# Altium PCB IDE_44m_to_40f_left.PcbDoc
Units mm, origin at the board's own origin, x right, y up, seen from the top; angles counter-clockwise.
Board outline 60.07 x 36.32 mm, 2 copper layers (Top Layer, Bottom Layer), stack 1.594 mm thick; 6 components, 35 nets, 96 pads, 2 vias.
Unrouted connection lines stored in the file: 36.
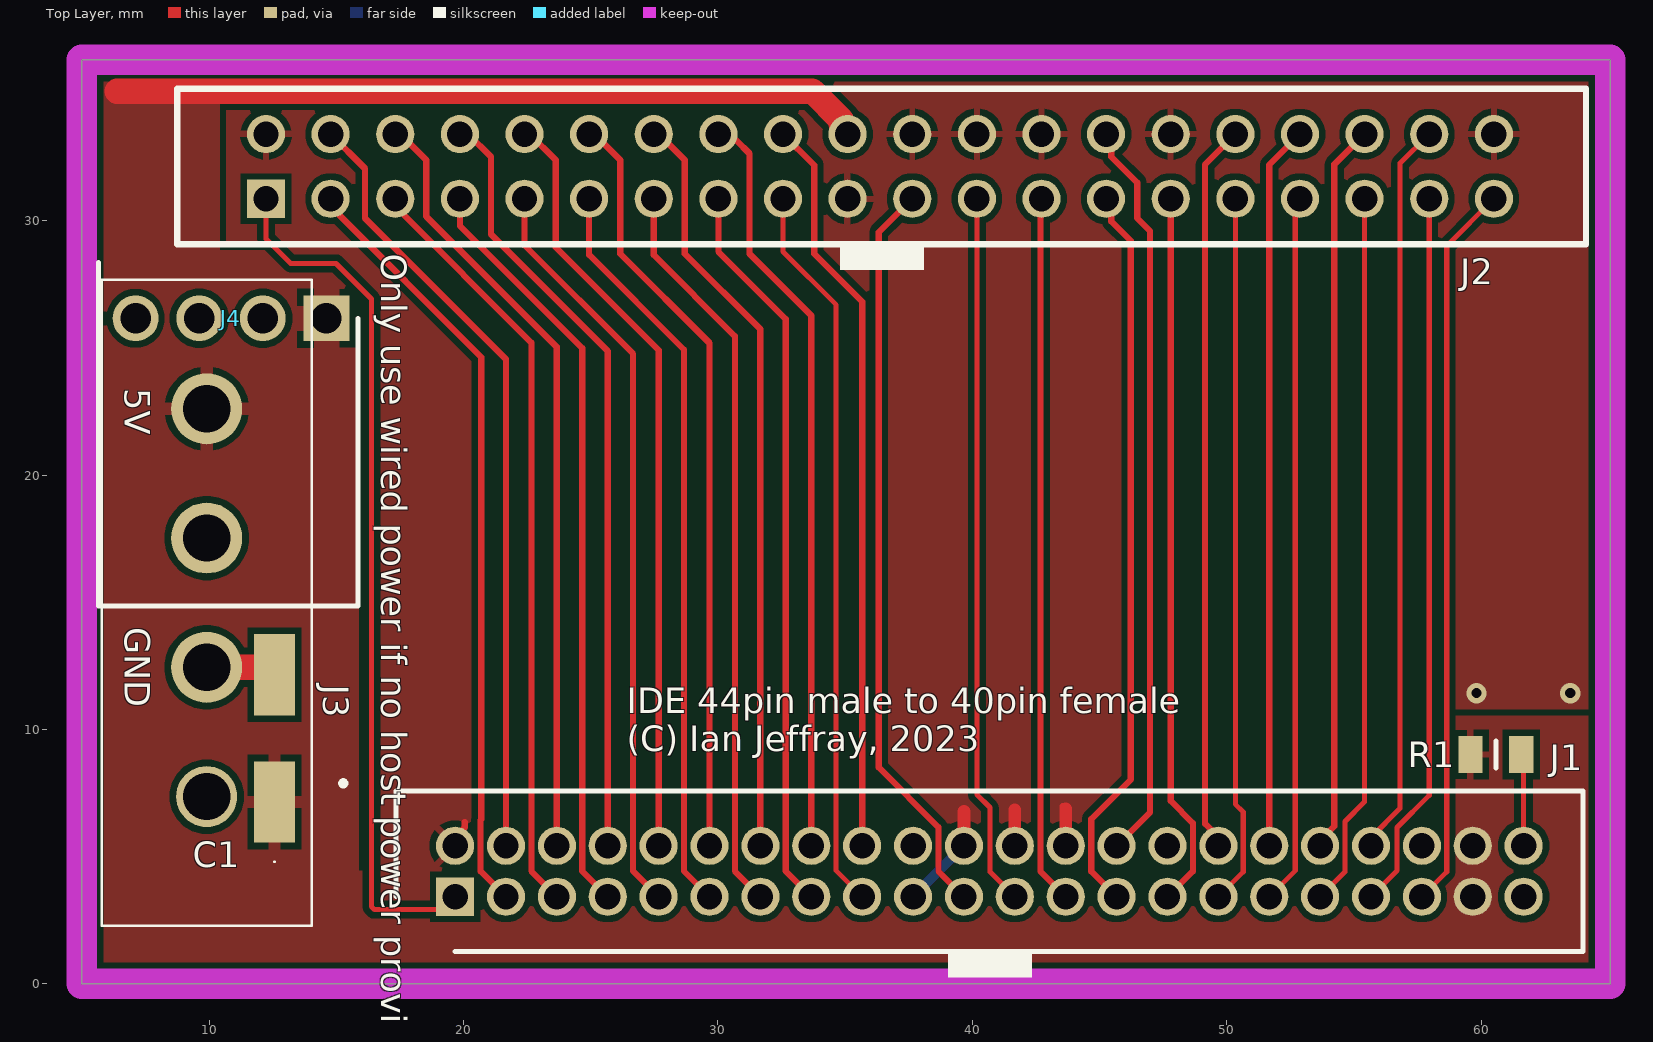
[diagram p0: Top Layer view]
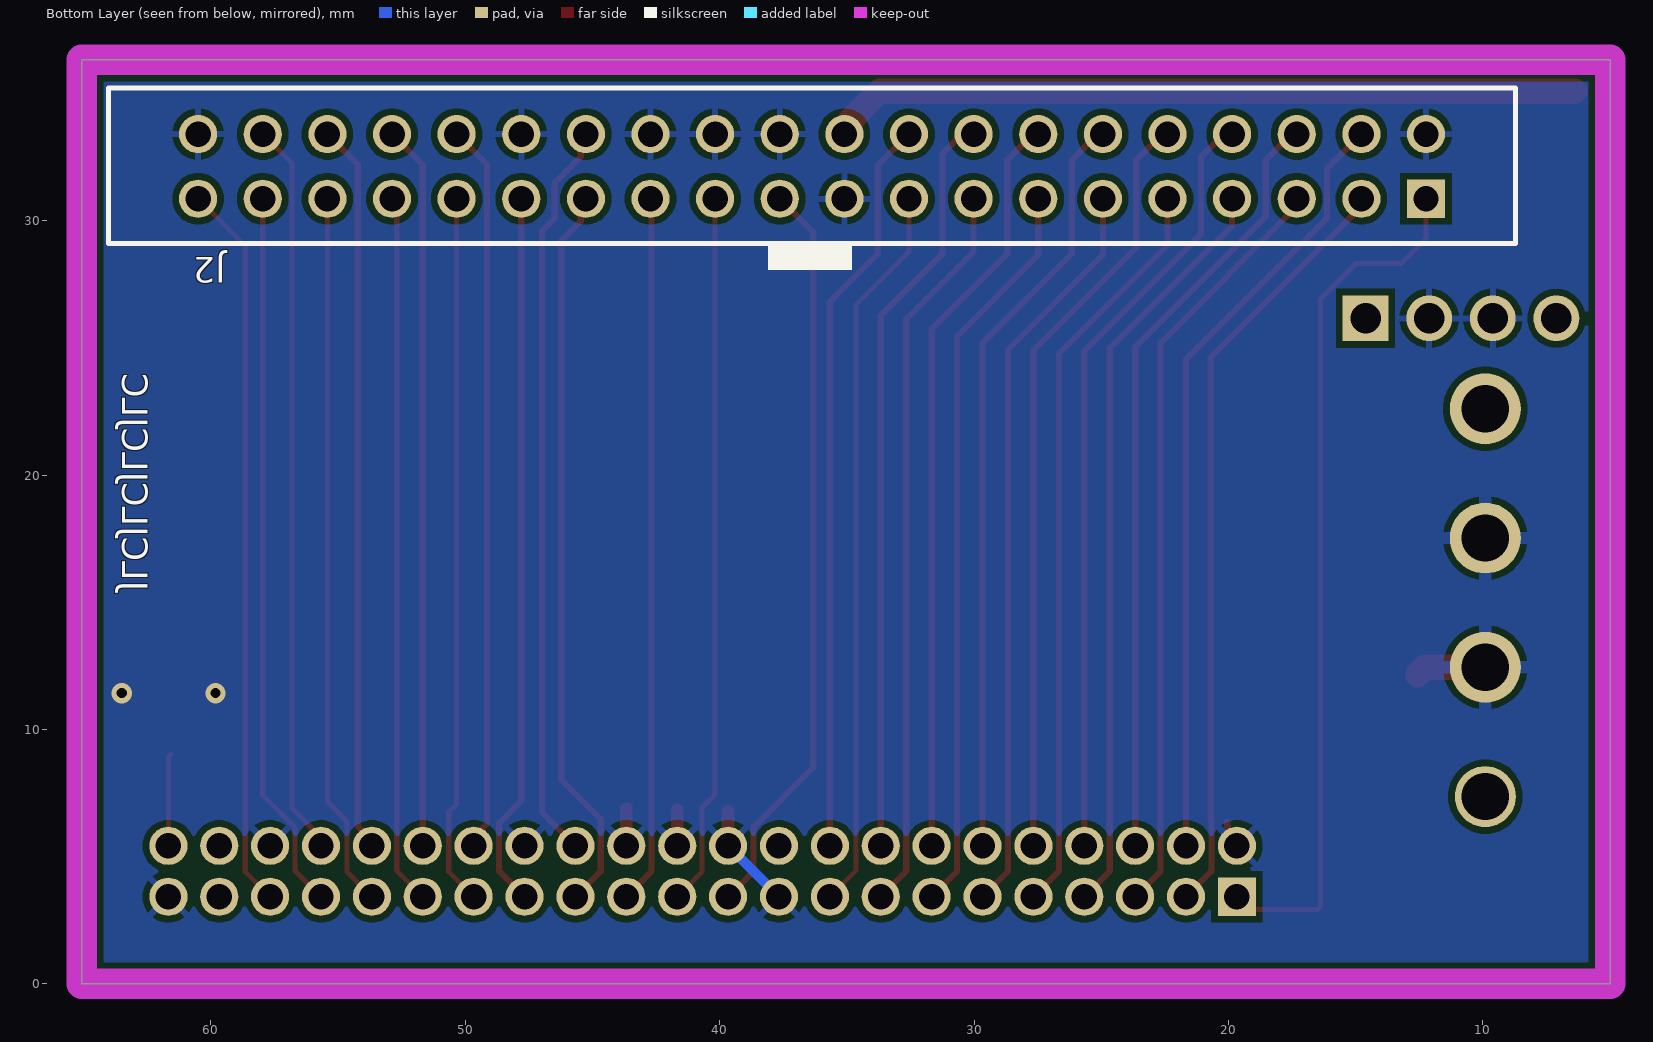
[diagram p1: Bottom Layer view, seen from below]
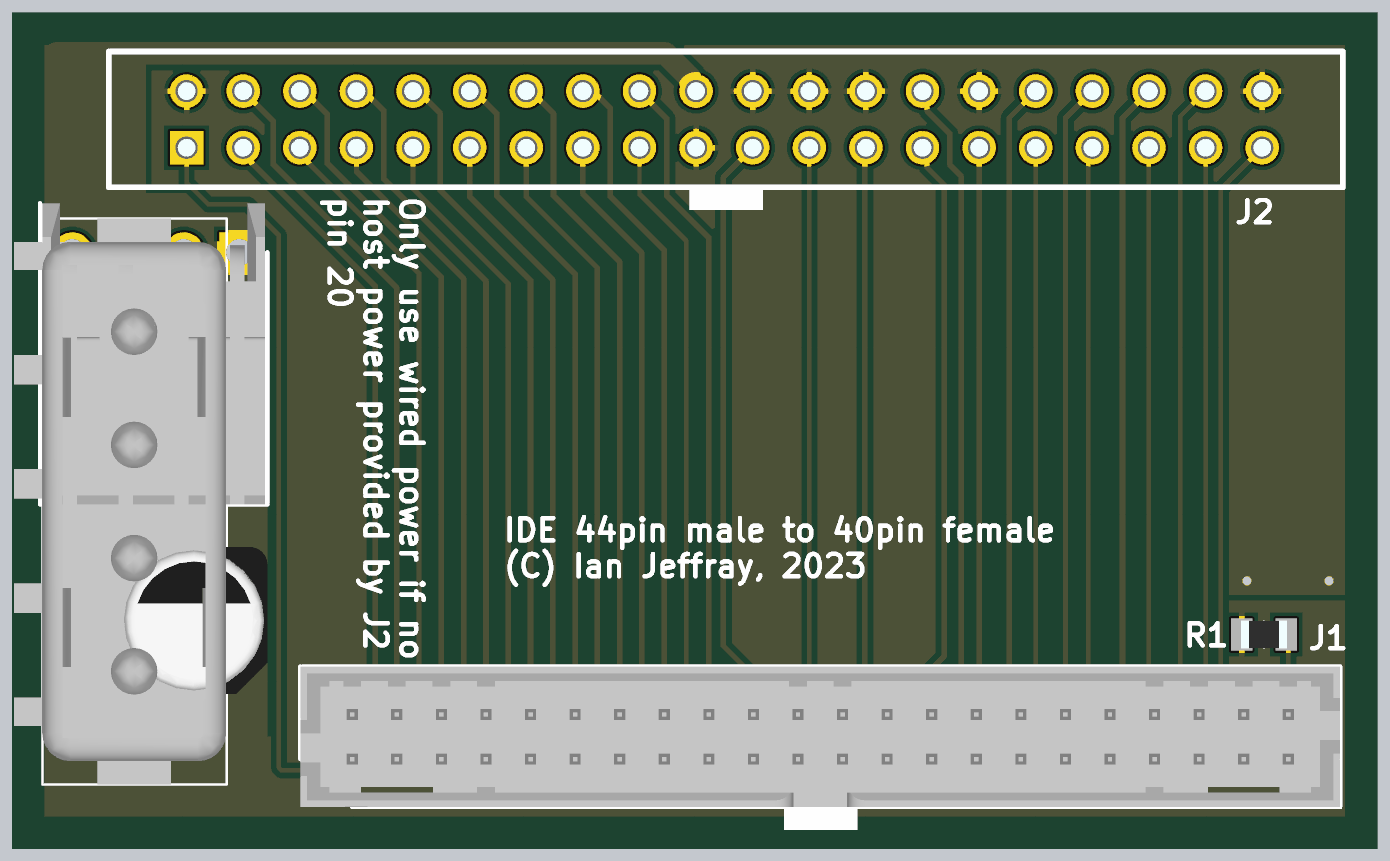
[diagram p2: 3D render of the assembled board from above, using the file's embedded part models]

## Layer stack, top to bottom
Top Solder: solder mask 0.0102, Solder Resist, Dk 3.5
Top Layer: signal copper 0.035
Dielectric 1: dielectric 1.524, FR-4, Dk 4.8
Bottom Layer: signal copper 0.035
Bottom Solder: solder mask 0.0102, Solder Resist, Dk 3.5

## Board outline
5,36.322 65.071,36.322 65.071,0 5,0

## Design rules (kind name [scope] priority, off if disabled: settings)
Clearance [All] p1: gap=0.254 ignorepadtopadclearanceinfootprint=FALSE except(0: Arc-Hole Track-Hole SMDPad-Hole THPad-Hole Via-Hole Fill-Hole Poly-Hole Region-Hole Text-Hole; 0.127: Arc-Arc Arc-Track Arc-THPad Track-Track Track-THPad)
ComponentClearance [All] p1: gap=0.127 collisioncheckmode=3 verticalgap=0.254 showdistances=FALSE
PolygonConnect [All] p1: connectstyle=Direct reliefconductorwidth=0.254 reliefentries=4 polygonreliefangle="90 Angle" airgapwidth=0.254
RoomDefinition IDE_44m_to_40f [InComponentClass('IDE_44m_to_40f')] p1: confinementstyle=ConfineIn formatcopy=TRUE lockcomponents=FALSE outline 66.548,0 71.628,0 71.628,3.937 66.548,3.937
RoutingVias [All] p1: holewidth=0.711 width=1.27 viastyle="Through Hole" minholewidth=0.711 minwidth=1.27 maxholewidth=0.711 maxwidth=1.27
SolderMaskExpansion [All] p1: expansion=0.102 istentingtop=FALSE
Width [All] p1: maxlimit=0.254 minlimit=0.127 preferedwidth=0.254 minimp=50.000000 maximp=50.000000 favimp=50.000000
29 further rules are at their usual default settings.

## Components (designator, comment, footprint, x,y, rotation, side; value= is the part's Value field where it differs from the comment)
C1 "EEE1VA470WP" EEE1AA101SP 12.573,9.652 r90 top value=47uF
J1 "87831-4420" SHDR44W55P200_2X22_4665X630X640P 19.671,3.429 r0 top value="44pin male 2mm"
J2 "8540-4500PL" 85404500PL 12.239,30.861 r180 bottom value="40pin female 2.54mm"
J3 "350211-1" 3502111 9.906,7.366 r270 top
J4 "171826-4" SHDRRA4W69P0X250_1X4_1000X1350X670P 14.612,26.162 r180 top
R1 "CRCW08054K70FKEAHP" RESC2012X50N 60.579,9.017 r180 top value=4k7

## Footprints (in the part's own frame and the unit in brackets; to place one, negate y for a bottom-side part, rotate by r counter-clockwise, add the part's x,y. Pads: shape width x height; smd on the part's side, far side on the other; paste and mask are expansions set on the pad)
3502111 [mm]
  round 2.4 hole 1.86: 1(0,0)
  round 2.79 hole 1.86: 2(-5.08,0) 3(-10.16,0) 4(-15.24,0)
  silkscreen extent -20.32,-4.13 5.08,5.47, body extent -20.32,-5.42 5.08,4.11, height 10.13
85404500PL [mm]
  rect 1.5x1.5 hole 1: 1(0,0)
  round 1.5 hole 1: 2(0,2.54) 3(-2.54,0) 4(-2.54,2.54) 5(-5.08,0) 6(-5.08,2.54) 7(-7.62,0) 8(-7.62,2.54) 9(-10.16,0) 10(-10.16,2.54) 11(-12.7,0) 12(-12.7,2.54) 13(-15.24,0) 14(-15.24,2.54) 15(-17.78,0) 16(-17.78,2.54) 17(-20.32,0) 18(-20.32,2.54) 19(-22.86,0) 20(-22.86,2.54) 21(-25.4,0) 22(-25.4,2.54) 23(-27.94,0) 24(-27.94,2.54) 25(-30.48,0) 26(-30.48,2.54) 27(-33.02,0) 28(-33.02,2.54) 29(-35.56,0) 30(-35.56,2.54) 31(-38.1,0) 32(-38.1,2.54) 33(-40.64,0) 34(-40.64,2.54) 35(-43.18,0) 36(-43.18,2.54) 37(-45.72,0) 38(-45.72,2.54) 39(-48.26,0) 40(-48.26,2.54)
  silkscreen extent -51.78,-1.75 3.52,4.35, body extent -51.78,-1.75 3.52,4.35, height 10.9
EEE1AA101SP [mm]
  rect 3.2x1.6 smd: 1(-2.5,0) 2(2.5,0)
  silkscreen extent -4.88,-0.02 -4.82,0.02, body extent 0,0 0,0
RESC2012X50N [mm]
  rect 0.95x1.45 smd: 1(-1,0) 2(1,0)
  silkscreen extent 0,-0.53 0,0.53, body extent -1.02,-0.63 1.02,0.63, height 0.5
SHDR44W55P200_2X22_4665X630X640P [mm]
  rect 1.5x1.5 hole 1: 1(0,0)
  round 1.5 hole 1: 2(0,2) 3(2,0) 4(2,2) 5(4,0) 6(4,2) 7(6,0) 8(6,2) 9(8,0) 10(8,2) 11(10,0) 12(10,2) 13(12,0) 14(12,2) 15(14,0) 16(14,2) 17(16,0) 18(16,2) 19(18,0) 20(18,2) 21(20,0) 22(20,2) 23(22,0) 24(22,2) 25(24,0) 26(24,2) 27(26,0) 28(26,2) 29(28,0) 30(28,2) 31(30,0) 32(30,2) 33(32,0) 34(32,2) 35(34,0) 36(34,2) 37(36,0) 38(36,2) 39(38,0) 40(38,2) 41(40,0) 42(40,2) 43(42,0) 44(42,2)
  silkscreen extent -2.32,-2.15 44.32,4.15, body extent -2.32,-2.15 44.33,4.15, height 6.2
SHDRRA4W69P0X250_1X4_1000X1350X670P [mm]
  rect 1.8x1.8 hole 1.2: 1(0,0)
  round 1.8 hole 1.2: 2(2.5,0) 3(5,0) 4(7.5,0)
  silkscreen extent -1.25,-2.2 8.95,11.3, body extent -1.15,-2.2 8.85,11.3, height 6.7

## Part data
C1: "Capacitor Polarised", Manufacturer_Name=Panasonic, Datasheet Link=http://industrial.panasonic.com/cdbs/www-data/pdf/RDE0000/ABA0000C1145.pdf, Height=7.8mm, Manufacturer_Part_Number=EEE1VA470WP
J1: "Drive connector", Manufacturer_Name=Molex, Mouser Part Number=538-87831-4420, Datasheet Link=https://datasheet.datasheetarchive.com/originals/distributors/Datasheets-DGA22/2095109.pdf, Height=6.4mm, Manufacturer_Part_Number=87831-4420, Mouser Price/Stock=https://www.mouser.co.uk/ProductDetail/Molex/87831-4420?qs=tYx%252BZc2nXqqGnHzye8Wn9w%3D%3D
J2: "Connector", Manufacturer_Name=3M, Mouser Part Number=517-8540-4500PL, Arrow Part Number=8540-4500PL, Arrow Price/Stock=https://www.arrow.com/en/products/8540-4500pl/3m?region=europe, Datasheet Link=https://datasheet.datasheetarchive.com/originals/distributors/Datasheets-1/DSA-266.pdf, Height=10.8mm, Manufacturer_Part_Number=8540-4500PL, Mouser Price/Stock=https://www.mouser.co.uk/ProductDetail/3M-Electronic-Solutions-Division/8540-4500PL?qs=7lbtAbU1WMyb%2F8dgNHAAlg%3D%3D
J3: "Alternate power input", Manufacturer_Name="TE Connectivity", Mouser Part Number=571-3502111, Arrow Part Number=350211-1, Arrow Price/Stock=https://www.arrow.com/en/products/350211-1/te-connectivity?region=nac, Datasheet Link=http://uk.rs-online.com/web/p/products/1638437, Height=10.29mm, Manufacturer_Part_Number=350211-1, Mouser Price/Stock=https://www.mouser.co.uk/ProductDetail/TE-Connectivity-AMP/350211-1?qs=wtYpWE7xRjkLa2TSgKGgng%3D%3D
J4: "Connector", Manufacturer_Name="TE Connectivity", Mouser Part Number=571-1718264, Arrow Part Number=171826-4, Arrow Price/Stock=https://www.arrow.com/en/products/171826-4/te-connectivity?region=nac, Datasheet Link=https://componentsearchengine.com/Datasheets/2/171826-4.pdf, Height=6.7mm, Manufacturer_Part_Number=171826-4, Mouser Price/Stock=https://www.mouser.co.uk/ProductDetail/TE-Connectivity/171826-4?qs=4hg9R9g9MDt3qYFe2l2pbA%3D%3D
R1: "4k7 Resistor", Manufacturer_Name=Vishay, Mouser Part Number=71-CRCW08054K70FKEAH, Arrow Part Number=CRCW08054K70FKEAHP, Arrow Price/Stock=https://www.arrow.com/en/products/crcw08054k70fkeahp/vishay?region=nac, Datasheet Link=http://uk.rs-online.com/web/p/products/8123574, Height=0.5mm, Manufacturer_Part_Number=CRCW08054K70FKEAHP, Mouser Price/Stock=https://www.mouser.co.uk/ProductDetail/Vishay-Dale/CRCW08054K70FKEAHP?qs=k2%2FDWSARqgEa%252B2IrxOkJMA%3D%3D

## Via types
v1: diameter 0.8, hole 0.4, Top Layer to Bottom Layer, tented both sides, 2 vias

## Nets (pads, with @x,y where several pads share a name; then routed paths per layer and width w, separated by ;. In a path a pad name is that pad's centre, name@x,y a point inside that pad or via, vN(x,y) a via of type N, cw(c..) or ccw(c..) an arc to the next point about the centre after c; other vN are vias at no path point)
A0: J1.35 J2.35 | length 28.2
  Top Layer w0.2: J1.35 54.648,4.406 54.648,6.388 55.419,7.159 J2.35
A1: J1.33 J2.33 | length 27.9
  Top Layer w0.2: J1.33 52.694,4.452 52.694,30.676 J2.33
A2: J1.36 J2.36 | length 28.7
  Top Layer w0.254: J1.36 53.671,5.643 54.229,6.201 54.229,32.211 J2.36@55.408,33.39
ACTIVEn: J1.39 J2.39 | length 28.6
  Top Layer w0.2: J1.39 58.648,4.406 58.648,29.01 J2.39
ALE: J1.28 J2.28 | length 29.2
  Top Layer w0.24: J2.28 45.463,33.197 45.463,32.515 46.482,31.496 46.482,30.099 46.99,29.591 46.99,6.748 46.356,6.114 J1.28
BD1: J1.15 J2.15 | length 28.9
  Top Layer w0.24: J2.15 30.019,28.782 32.668,26.133 32.668,4.432 J1.15
BD2: J1.13 J2.13 | length 29.2
  Top Layer w0.24: J2.13 27.479,28.655 30.668,25.466 30.668,4.432 J1.13
BD3: J1.11 J2.11 | length 29.4
  Top Layer w0.24: J2.11 24.939,28.655 28.668,24.926 28.668,4.432 J1.11
BD4: J1.9 J2.9 | length 29.6
  Top Layer w0.24: J2.9 22.399,29.036 26.668,24.767 26.668,4.432 J1.9
CS0n: J1.37 J2.37 | length 28.4
  Top Layer w0.2: J1.37 56.694,4.452 56.694,6.148 57.959,7.413 J2.37
CS1n: J1.38 J2.38 | length 28.9
  Top Layer w0.203: J1.38 55.671,5.76 56.815,6.904 56.815,32.257 J2.38
D0: J1.17 J2.17 | length 28.7
  Top Layer w0.2: J2.17 32.559,28.782 34.648,26.693 34.648,4.452 J1.17
D5: J1.7 J2.7 | length 29.8
  Top Layer w0.24: J2.7 19.859,29.798 24.668,24.989 24.668,4.432 J1.7
D6: J1.5 J2.5 | length 30.1
  Top Layer w0.24: J2.5 17.319,30.56 22.668,25.211 22.668,4.432 J1.5
D7: J1.3 J2.3 | length 30.3
  Top Layer w0.24: 20.701,6.477 20.674,6.45 20.674,4.426 J1.3
  Top Layer w0.254: J2.3 14.779,30.56 20.701,24.638 20.701,6.477
D8: J1.4 J2.4 | length 30.8
  Top Layer w0.254: J2.4 16.129,32.051 16.129,30.099 21.671,24.557 J1.4
D9: J1.6 J2.6 | length 30.7
  Top Layer w0.254: J2.6 17.526,33.401 18.542,32.385 18.542,30.167 23.671,25.038 J1.6
D10: J1.8 J2.8 | length 30.6
  Top Layer w0.254: J2.8 20.193,33.401 21.082,32.512 21.082,29.464 25.671,24.875 J1.8
D11: J1.10 J2.10 | length 30.3
  Top Layer w0.254: J2.10 22.606,33.401 23.622,32.385 23.622,28.956 27.671,24.907 J1.10
D12: J1.12 J2.12 | length 30.1
  Top Layer w0.254: J2.12 25.146,33.401 26.162,32.385 26.162,28.702 29.671,25.193 J1.12
D13: J1.14 J2.14 | length 29.8
  Top Layer w0.254: J2.14 27.686,33.401 28.702,32.385 28.702,28.702 31.671,25.733 J1.14
D14: J1.16 J2.16 | length 29.8
  Top Layer w0.254: J2.16 30.257,33.163 30.718,33.163 31.242,32.639 31.242,28.702 33.671,26.273 J1.16
D15: J1.18 J2.18 | length 29.3
  Top Layer w0.254: J2.18 33.782,32.178 33.782,28.702 35.671,26.813 J1.18
DMACKn: J1.29 J2.29 | length 28.2
  Top Layer w0.24: J1.29 48.668,4.426 48.668,6.323 47.799,7.192 J2.29
DMARQ: J1.21 J2.21 | length 29.4
  Top Layer w0.24: J2.21 36.322,29.544 36.322,8.509 38.668,6.163 38.668,4.432 J1.21
GND: C1.2 J1.2 J1.19 J1.22 J1.24 J1.26 J1.30 J1.40 J1.43 J2.2 J2.19 J2.22 J2.24 J2.26 J2.30 J2.40 J3.2 J3.3 J4.2 J4.3 | length 11.2
  Top Layer w0.254: J1.2 19.671,5.766 20.059,6.154 20.059,6.365 ; 39.671,6.778 39.751,6.858 ; 41.656,6.858 41.671,6.843 ; 43.561,6.985 43.671,6.875
  Top Layer w0.5: J1.22 39.671,6.778 ; J1.24 41.671,6.843 ; J1.26 43.671,6.875
  Top Layer w1: J3.2 12.279,12.446 C1.2
  Bottom Layer w0.4: J1.19 J1.22
  other v1: 59.817,11.43 63.5,11.43
IO_CH_RDY: J1.27 J2.27 | length 28.9
  Top Layer w0.24: J2.27 45.463,30.657 45.463,29.975 46.228,29.21 46.228,8.031 44.674,6.477 44.674,4.426 J1.27
IOCS16n: J1.32 J2.32 | length 28.7
  Top Layer w0.24: J1.32 49.671,5.77 49.149,6.292 49.149,32.211 J2.32
IORn: J1.25 J2.25 | length 27.9
  Top Layer w0.24: J2.25 42.674,30.816 42.674,4.426 J1.25
IOWn: J1.23 J2.23 | length 28.1
  Top Layer w0.2: J2.23 40.179,7.446 40.694,6.931 40.694,4.406 J1.23
IRQr: J1.31 J2.31 | length 28
  Top Layer w0.2: J1.31 50.648,4.406 50.648,6.756 50.339,7.065 J2.31
PDIAGn: J1.34 J2.34 | length 28.5
  Top Layer w0.24: J1.34 51.671,32.193 J2.34
RESETn: J1.1 J2.1 | length 34.8
  Top Layer w0.2: J2.1@12.711,30.389 J2.1 12.239,29.29 13.208,28.321 14.986,28.321 16.383,26.924 16.383,3.038 16.5,2.921 19.163,2.921 J1.1
Type: J1.44 R1.1 | length 3.6
  Top Layer w0.203: R1.1 61.671,8.925 J1.44
VCC: C1.1 J1.41 J1.42 J2.20 J3.4 J4.1 R1.2 | length 29.6
  Top Layer w1: 6.382,35.095 33.712,35.095 34.849,33.958 34.849,33.786 35.099,33.536 J2.20
pads on no net: J1.20 J3.1 J4.4

## Polygon pours and split planes (outlines as drawn)
GND on Bottom Layer "GND_L02_P000" (solid, remove dead copper, pour order 0): 5,0 65.071,0 65.071,36.322 5,36.322
VCC on Top Layer "NONET_L-01_P-001" (solid, remove dead copper, pour order 2): 5.08,0 65.024,0 65.024,10.541 58.928,10.541 58.928,4.445 15.875,4.445 15.875,28.829 10.414,28.829 10.414,36.322 4.953,36.322
GND on Top Layer "NONET_L-01_P-001" (solid, remove dead copper, pour order 4): 5.08,0 65.024,0 65.024,36.322 4.953,36.322

## Keep-outs
Keep-Out Layer:
  the board outline again, w1.2

## Silkscreen, mask and mechanical layers (free items; w line width, h text height)
Top Overlay:
  rectangle: 34.798,28.067 38.1,29.083
  rectangle: 39.036,0.254 42.338,1.27
  lines w0.254: 8.749,29.083 64.121,29.083 64.121,35.179 8.749,35.179 8.749,29.083
  text "Only use wired power if no host power provided by J2 pin 20" at 16.764,28.702 h1 r270
  text "J2" at 59.175,27.505 h1
  text "5V" at 6.677,23.422 h1 r270
  text "GND" at 6.677,14.024 h1 r270
  text "IDE 44pin male to 40pin female / (C) Ian Jeffray, 2023" at 26.416,9.144 h1
Bottom Overlay:
  rectangle: 34.798,28.067 38.1,29.083
  text "JLCJLCJLCJLC" at 63.474,15.44 h1 r90
Shape:
  the board outline again, w1.2